# EAGLE board Control-Board-V3 (EAGLE 9.7.0)
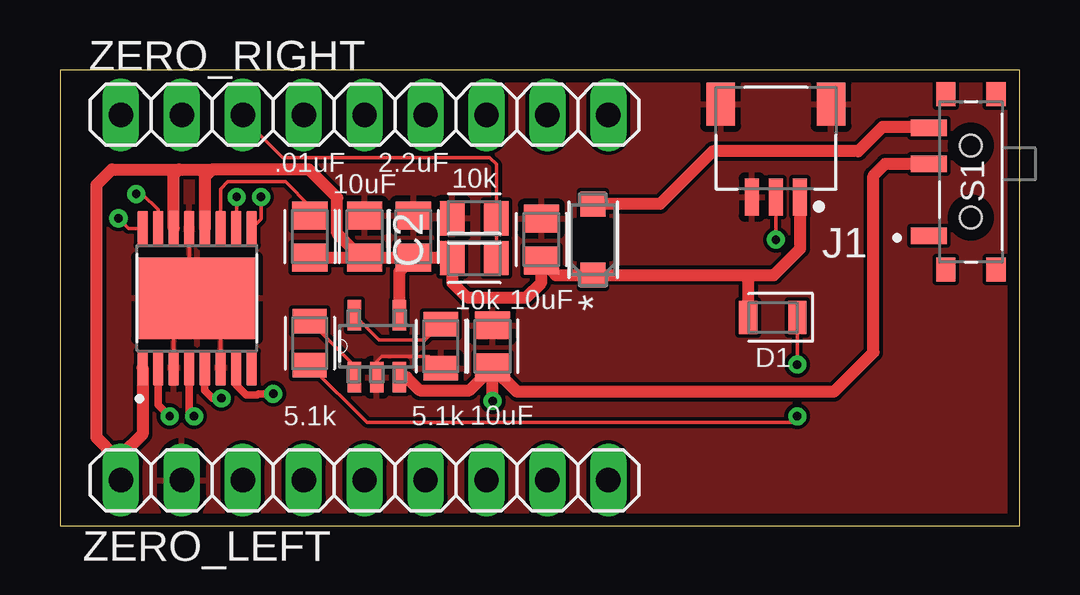
[diagram p0: board, top side]
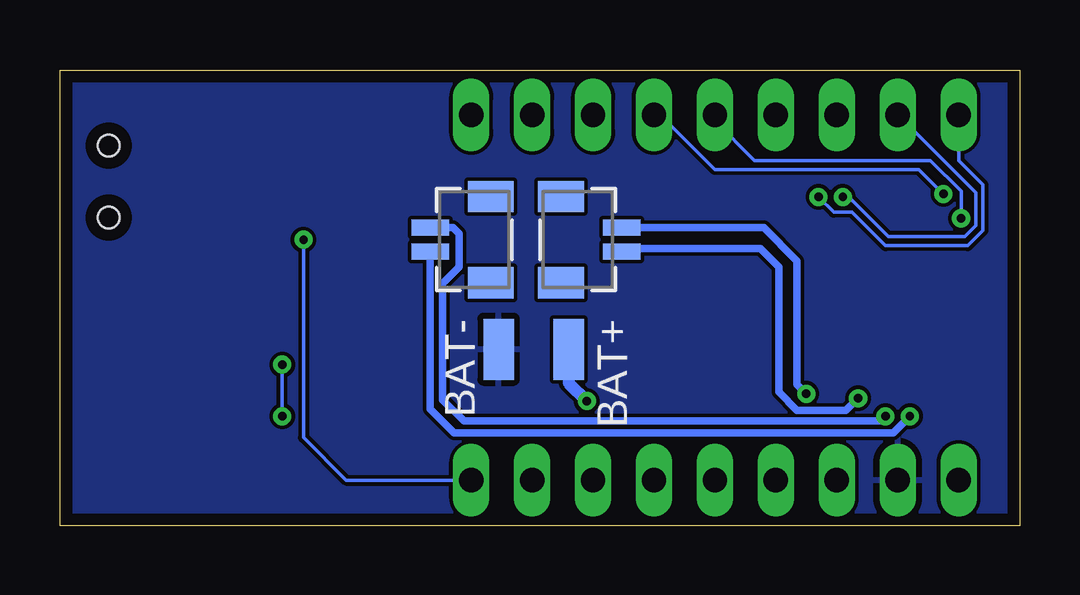
[diagram p1: board, bottom side, seen from below]

Size 40 x 19 mm. Coordinates in mm from the lower left corner, seen from the top.
Outline: 0,19 0,0 40,0 40,19 0,19
Copper layers (1*16): Top 0.035mm / dielectric 1.5mm / Bottom 0.035mm
Design rules "Fusion Electronics Design Rules": minimum track width 6mil, minimum drill 0.35mm, track to track 6mil, track to pad 6mil, pad to pad 6mil, via to via 6mil, smd to smd 6mil, copper to edge 20mil, drill to drill 6mil, minimum pad ring 10mil, minimum via ring 8mil, stop-mask expansion 4mil, vias tented up to drill 0mil, thermal gap 10mil

## Footprints (pad centres in the part's own frame; a part is rotated, then mirrored left to right if it is on the bottom)
SMD1,27-2,54 = smd 1.27 x 2.54: 1 0,0
CAPC2012X110 = smd 1.165 x 1.465: 1 -0.875,0; 2 0.875,0
LEDC2012X110N_FLAT-Y = smd 0.762 x 1.362: A 1.025,0; C -1.025,0
JST_SM03B-SRSS-TB(LF)(SN) = smd 0.6 x 1.55: 1 -1,0; 2 0,0; 3 1,0 | smd 1.2 x 1.8: S1 -2.3,-3.875; S2 2.3,-3.875
SDO_SOD-123FL(498)_OSI-L = smd 1.041 x 1.041: 1 -1.486,0; 2 1.486,0
JST = smd 0.66 x 1.549: 1 -0.5,1.83; 2 0.5,1.83 | smd 1.295 x 1.905: 3 -1.8,-0.695; 4 1.8,-0.695
RESC2012X65 = smd 1.031 x 1.42: 1 -0.919,0; 2 0.919,0
SW_EG1215AA = smd 0.7 x 1.5: 1 -2.25,1.75; 2 0.75,1.75; 3 2.25,1.75 | smd 1 x 0.8: S1 -3.65,1.05; S2 -3.65,-1.05; S3 3.65,-1.05; S4 3.65,1.05 | hole 0.9: -1.5,0; 1.5,0
IC_DRV8833PWP = smd 1.5 x 0.45: 1 -2.9,2.275; 2 -2.9,1.625; 3 -2.9,0.975; 4 -2.9,0.325; 5 -2.9,-0.325; 6 -2.9,-0.975; 7 -2.9,-1.625; 8 -2.9,-2.275; 9 2.9,-2.275; 10 2.9,-1.625; 11 2.9,-0.975; 12 2.9,-0.325; 13 2.9,0.325; 14 2.9,0.975; 15 2.9,1.625; 16 2.9,2.275 | smd 3.4 x 5: 17 0,0
SOT95P280X145-5N = smd 1.27 x 0.559: 1 -1.295,0.94; 2 -1.295,0; 3 -1.295,-0.94; 4 1.295,-0.94; 5 1.295,0.94
1X09 = drill 1.016 long: 1 -10.16,0; 2 -7.62,0; 3 -5.08,0; 4 -2.54,0; 5 0,0; 6 2.54,0; 7 5.08,0; 8 7.62,0; 9 10.16,0

## Placement (x,y rotation side)
BAT+  [SMD1,27-2,54]  18.8,7.37 180 bottom
BAT-  [SMD1,27-2,54]  21.72,7.37 180 bottom
C1  .01uF  [CAPC2012X110]  10.41,12.06 90 top
C2  10uF  [CAPC2012X110]  12.7,12.06 270 top
C3  2.2uF  [CAPC2012X110]  14.73,12.06 270 top
C4  10uF  [CAPC2012X110]  18.03,7.49 90 top
C5  10uF  [CAPC2012X110]  20.07,11.94 90 top
D1  LED_YELLOW  [LEDC2012X110N_FLAT-Y]  29.72,8.69 180 top
J1  SM03B-SRSS-TB(LF)(SN)  [JST_SM03B-SRSS-TB(LF)(SN)]  29.84,13.72 180 top
MB120  MBR120LSFT3GSDO_SOD-123FL(498)_OSI-L  [SDO_SOD-123FL(498)_OSI-L]  22.23,11.94 90 top
MOTOR_1  JST_SH  [JST]  22.73,11.94 90 bottom
MOTOR_2  JST_SH  [JST]  18.41,11.94 270 bottom
R1  5.1k  [RESC2012X65]  10.41,7.62 90 top
R2  5.1k  [RESC2012X65]  15.88,7.49 90 top
R3  10k  [RESC2012X65]  17.27,11.16 0 top
R4  10k  [RESC2012X65]  17.27,12.83 180 top
S1  EG1215AA  [SW_EG1215AA]  37.97,14.35 90 top
U1  DRV8833PWP  [IC_DRV8833PWP]  5.71,9.5 90 top
U$1  MCP73831T-2ACI/OT  [SOT95P280X145-5N]  13.21,7.49 90 top
ZERO_LEFT  PINHD-1X09_1X09M  [1X09]  12.7,1.91 0 top
ZERO_RIGHT  PINHD-1X09_1X09M  [1X09]  12.7,17.14 0 top

## Library data of the parts
BAT+ BAT- = wirepad
C1-C5 = Capacitor; CATEGORY: Capacitor
D1 = LED; CATEGORY: LED; COLOR: YELLOW; DESCRIPTION: CHIP LED FLAT; SUB-CATEGORY: CHIP; TYPE: FLAT_TOP
J1 = JST-SH/SR-3PIN; CHECK_PRICES: https://www.snapeda.com/parts/SM03B-SRSS-TB(LF)(SN)/JST+Sales+America+Inc./view-part/?ref=eda; DESCRIPTION: Connector Header Surface Mount, Right Angle 3 position 0.039 (1.00mm); MF: JST Sales America Inc.; MP: SM03B-SRSS-TB(LF)(SN); PACKAGE: None; SNAPEDA_LINK: https://www.snapeda.com/parts/SM03B-SRSS-TB(LF)(SN)/JST+Sales+America+Inc./view-part/?ref=snap
MB120 = MB120; COPYRIGHT: Copyright (C) 2024 Ultra Librarian. All rights reserved.; MANUFACTURER_PART_NUMBER: MBR120LSFT3G; MFR_NAME: onsemi
MOTOR_1 MOTOR_2 = calico
R1-R4 = Resistor; CATEGORY: Resistor; SUB-CATEGORY: Fixed
S1 = EG1215AA; MANUFACTURER: E Switch; MAXIMUM_PACKAGE_HEIGHT: 1.40mm; PARTREV: A; STANDARD: Manufacturer Recommendations
U1 = calico; AVAILABILITY: Warning; DESCRIPTION: 10.8-V, 2-A dual H-bridge motor driver with current regulation 16-HTSSOP -40 to 85; DIGIKEY-PURCHASE-URL: https://snapeda.com/shop?store=DigiKey&id=377881; MANUFACTURER: Texas Instruments; MAXIMUM_PACKAGE_HEIGHT: 1.2mm; MOUSER-PURCHASE-URL: https://snapeda.com/shop?store=Mouser&id=377881; MP: DRV8833PWP; PACKAGE: HTSSOP-16 Texas Instruments; PARTREV: E; PRICE: None; STANDARD: Manufacturer Recommendations; TEXAS_INSTRUMENTS-PURCHASE-URL: https://snapeda.com/shop?store=Texas+Instruments&id=377881
U$1 = MCP73831T-2ACI_OT; MPN: MCP73831T-2ACI/OT; OC_FARNELL: 1332158; OC_NEWARK: 56K7045; PACKAGE: SOT-5; SUPPLIER: Microchip
ZERO_LEFT ZERO_RIGHT = Tinkercad

## Nets
3V3_OUT: ZERO_LEFT.3
A1: MOTOR_1.1 U1.2
A2: MOTOR_1.2 U1.4
B1: MOTOR_2.1 U1.7
B2: MOTOR_2.2 U1.5
GND: BAT-.1 C2.1 C3.1 C4.2 C5.2 J1.3 J1.S1 J1.S2 R2.1 R4.2 U1.3 U1.6 U1.13 U1.17 U$1.2 ZERO_LEFT.2
IO1: ZERO_LEFT.4
IO2: ZERO_LEFT.5
IO3: ZERO_LEFT.6
IO4: ZERO_LEFT.7
IO5: ZERO_LEFT.8
IO6: J1.2 ZERO_LEFT.9
IO7: U1.9 ZERO_RIGHT.1
IO8: U1.10 ZERO_RIGHT.2
IO9: R3.2 R4.1 ZERO_RIGHT.3
IO10: ZERO_RIGHT.4
IO11: U1.16 ZERO_RIGHT.5
IO12: U1.15 ZERO_RIGHT.6
IO13: ZERO_RIGHT.7
N$1: C1.2 U1.11
N$2: R1.2 U$1.1
N$3: D1.C R1.1
N$4: R2.2 U$1.5
N$6: MB120.2 S1.3
RX: ZERO_RIGHT.8
TX: ZERO_RIGHT.9
V_BAT: BAT+.1 C4.1 S1.2 U$1.3
V_BUS: C1.1 C2.2 C3.2 C5.1 D1.A J1.1 MB120.1 R3.1 U1.1 U1.12 U1.14 U$1.4 ZERO_LEFT.1

## Tracks (layer width: path | path; a pad name or v marks a point on that pad's centre or on a via)
A1  (via drill 0.35)
  Top 0.305: v4.57,4.57 4.09,5.05 U1.2
  Bottom 0.305: v4.57,4.57 5.25,3.89 23.57,3.89 24.56,4.88 MOTOR_1.1
A2  (via drill 0.35)
  Top 0.305: v5.59,4.57 5.39,4.77 U1.4
  Bottom 0.305: v5.59,4.57 5.79,4.37 23.16,4.37 24.05,5.26 24.05,10.11 23.37,10.79 23.37,12.19 23.62,12.45 MOTOR_1.2
B1  (via drill 0.35)
  Top 0.305: U1.7 7.34,5.88 7.76,5.46 8.22,5.46 8.27,5.51 v8.89,5.51
  Bottom 0.305: v8.89,5.51 9.27,5.89 9.27,11.05 10.66,12.44 MOTOR_2.1
B2  (via drill 0.35)
  Top 0.305: U1.5 6.04,5.64 6.37,5.32 v6.73,5.32
  Bottom 0.305: v6.73,5.32 6.75,5.32 7.24,4.83 9.27,4.83 10.03,5.59 10.03,10.79 10.8,11.56 16.46,11.56 MOTOR_2.2
GND
  Top 0.152: U1.13 5.39,9.82 U1.17 | U1.3 4.74,8.53 U1.17 | U1.6 6.69,8.53 U1.17 | R2.1 15.39,7.06 13.41,7.06 13.21,6.86 U$1.2
  pour Top: 0.08,0.08 39.85,0.08 39.93,0.16 39.93,18.97 0.16,18.97 0.08,18.89
  pour Bottom: 0.08,0.08 39.85,0.08 39.93,0.16 39.93,18.89 39.85,18.97 0.08,18.97
IO6  (via drill 0.35)
  Top 0.152: v29.84,11.94 J1.2
  Bottom 0.152: ZERO_LEFT.9 28.07,1.91 29.84,3.68 v29.84,11.94
IO7  (via drill 0.35)
  Top 0.152: v8.38,13.72 8.38,12.79 U1.9
  Bottom 0.152: ZERO_RIGHT.1 2.54,15.24 1.52,14.22 1.52,12.32 2.16,11.68 5.59,11.68 6.99,13.08 7.75,13.08 v8.38,13.72
IO8  (via drill 0.35)
  Top 0.152: v7.37,13.72 7.37,12.43 U1.10
  Bottom 0.152: v7.37,13.72 7.11,13.72 5.46,12.06 2.29,12.06 1.83,12.52 1.83,13.89 ZERO_RIGHT.2
IO9
  Top 0.152: ZERO_RIGHT.3 7.62,17.02 9.27,15.37 17.91,15.37 18.19,15.08 R4.1 R3.2
IO11  (via drill 0.35)
  Top 0.152: U1.16 2.86,12.4 v2.44,12.83
  Bottom 0.152: ZERO_RIGHT.5 12.7,16.89 11.05,15.24 3.71,15.24 2.44,13.96 v2.44,12.83
IO12  (via drill 0.35)
  Top 0.152: U1.15 4.09,13.18 3.43,13.84 v3.17,13.84
  Bottom 0.152: ZERO_RIGHT.6 14.99,17.14 12.7,14.86 4.19,14.86 v3.17,13.84
N$1
  Top 0.152: C1.2 10.41,13.34 9.4,14.35 6.99,14.35 6.69,14.06 U1.11
N$2
  Top 0.152: R1.2 12.27,6.68 U$1.1
N$3  (via drill 0.35)
  Top 0.152: R1.1 12.8,4.32 30.48,4.32 v30.73,4.57 | v30.73,6.73 D1.C
  Bottom 0.152: v30.73,4.57 v30.73,6.73
N$4
  Top 0.152: U$1.5 13.31,7.75 15.21,7.75 R2.2
N$6
  Top 0.152: 36.19,16.64 S1.3
  Top 0.508: MB120.2 25.02,13.42 27.22,15.62 33.27,15.62 34.29,16.64 36.19,16.64
V_BAT  (via drill 0.35)
  Top 0.508: C4.1 17.07,5.65 15,5.65 14.45,6.2 U$1.3 | C4.1 19.06,5.59 32.26,5.59 33.91,7.24 33.91,14.61 34.41,15.1 S1.2 | v18.03,5.21 C4.1
  Bottom 0.508: BAT+.1 18.8,5.97 v18.03,5.21
V_BUS
  Top 0.508: C1.1 C2.2 | C2.2 C3.2 | C3.2 16.33,11.19 R3.1 16.35,10.15 16.98,9.53 19.43,9.53 20.07,10.16 C5.1 20.68,10.45 MB120.1 28.7,10.45 | 6.35,14.86 6.04,14.55 U1.12 | U1.14 4.74,14.65 4.95,14.86 | 4.95,14.86 6.35,14.86 | C2.2 12.56,11.19 11.55,12.2 11.55,13.69 10.38,14.86 6.35,14.86 | U1.1 3.44,3.82 2.54,2.92 | 4.95,14.86 2.16,14.86 1.52,14.22 1.52,3.68 2.29,2.92 2.54,2.92 | ZERO_LEFT.1 2.54,2.92 | U$1.4 14.15,10.61 C3.2 | 28.7,10.45 29.76,10.45 30.86,11.56 30.86,13.7 J1.1 | D1.A 28.69,10.44 28.7,10.45